# EAGLE board KCVGA (EAGLE 7.2.0)
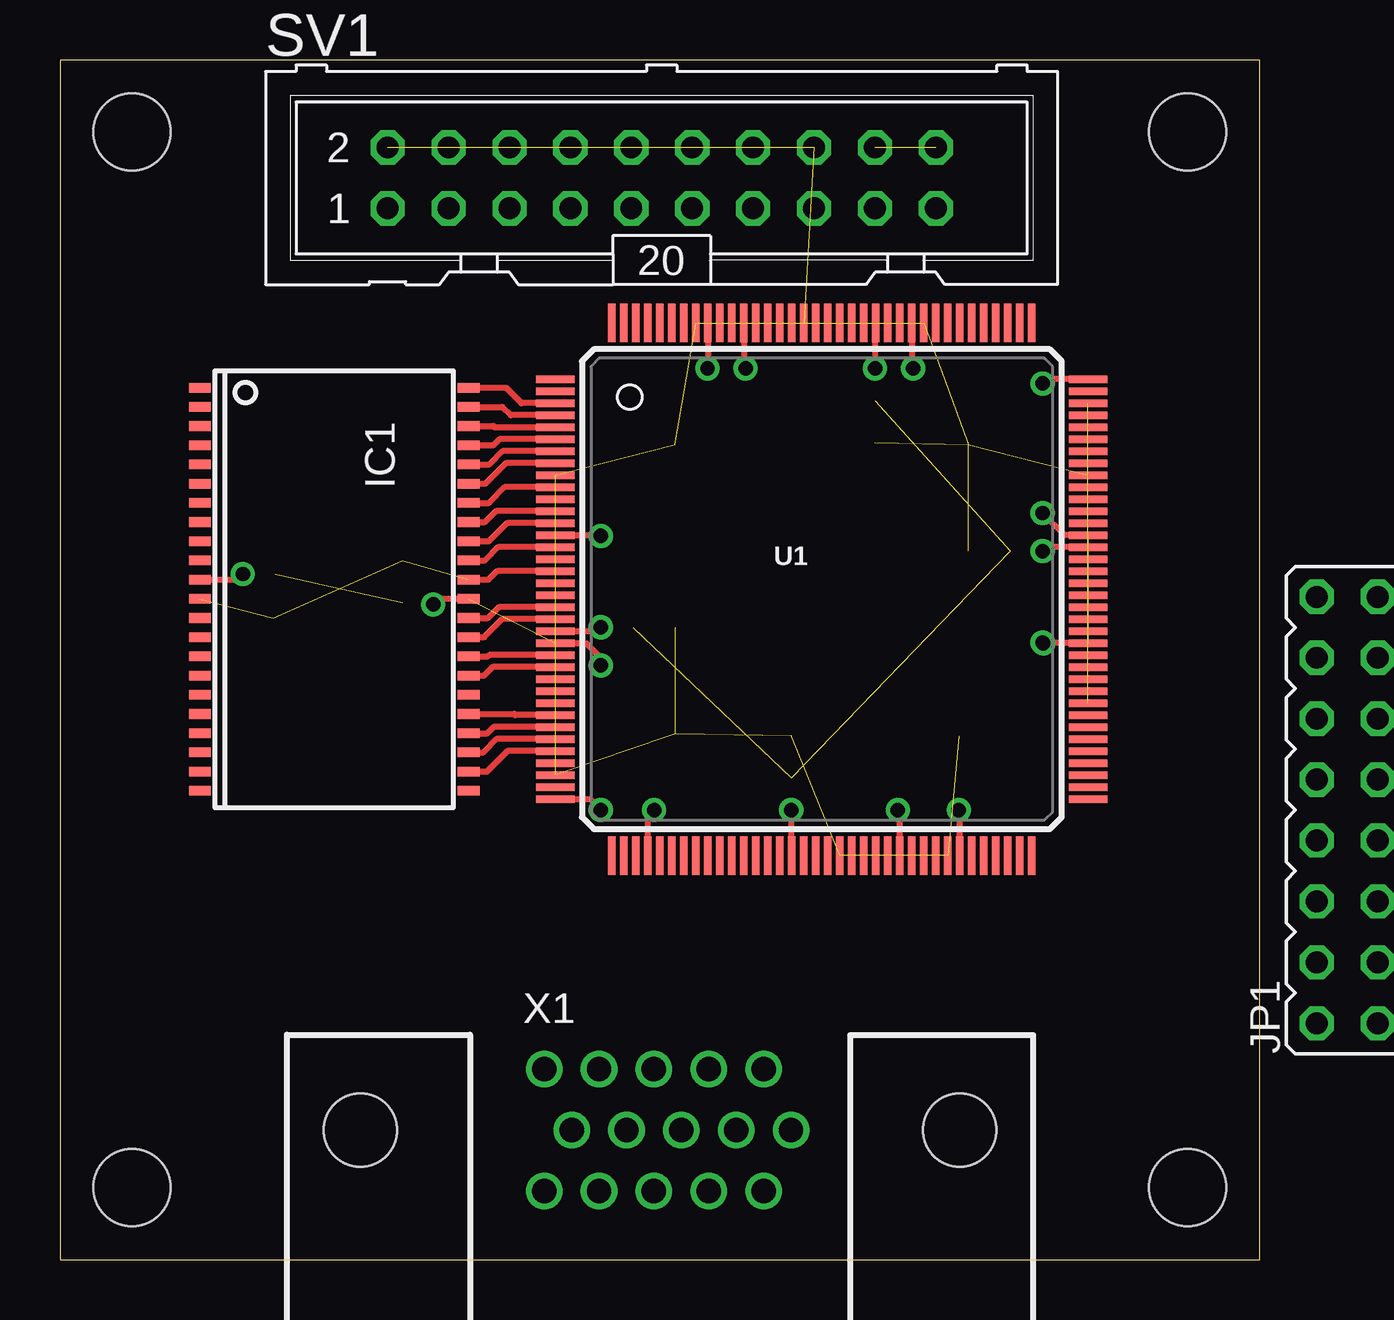
[diagram p0: board, top side]
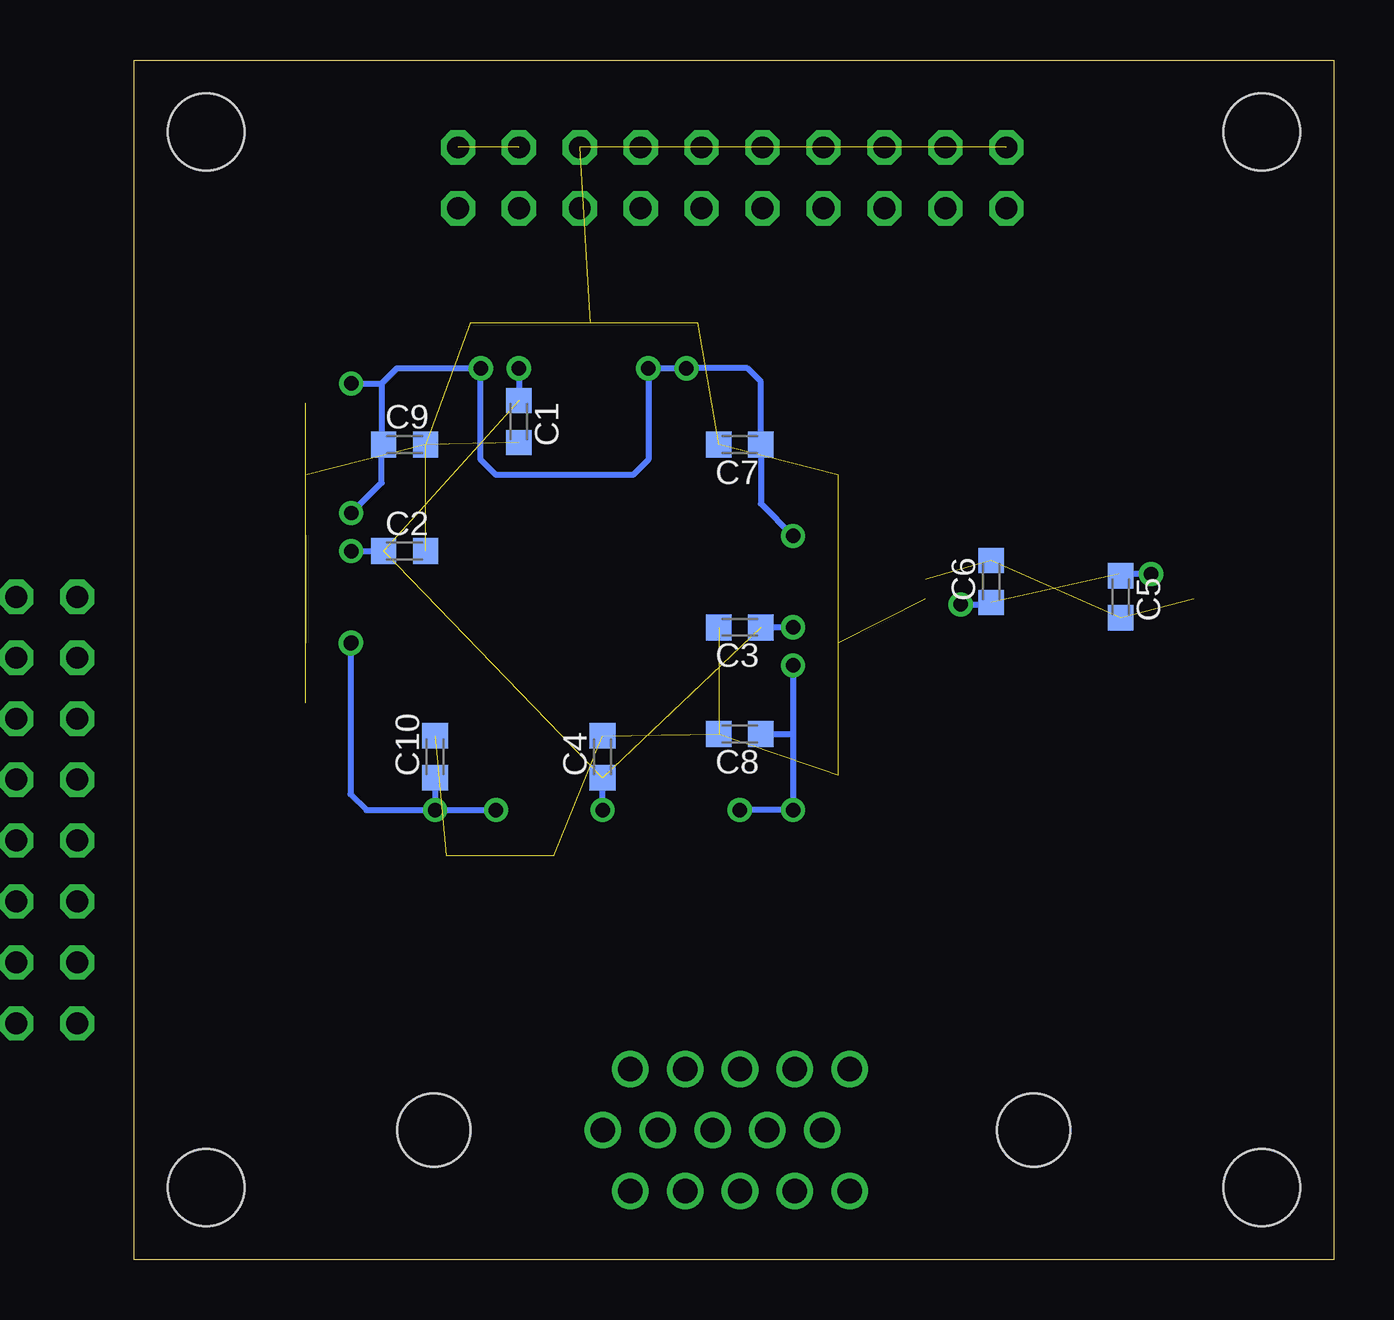
[diagram p1: board, bottom side, seen from below]

Size 50 x 50 mm. Coordinates in mm from the lower left corner, seen from the top.
Outline: 0,0 50,0 50,50 0,50 0,0
Copper layers (1*16): Top 0.035mm / dielectric 1.5mm / Bottom 0.035mm
Design rules "default": minimum track width 10mil, minimum drill 24mil, track to track 8mil, track to pad 8mil, pad to pad 8mil, via to via 8mil, smd to smd 8mil, copper to edge 40mil, drill to drill 8mil, minimum pad ring 10mil, minimum via ring 8mil, stop-mask expansion 4mil, vias tented up to drill 0mil, thermal gap 10mil
Holes 3.2 mm at 3,47 47,47 47,3 3,3

## Footprints (pad centres in the part's own frame; a part is rotated, then mirrored left to right if it is on the bottom)
C0603K = smd 1.05 x 1.08: 1 -0.875,0; 2 0.875,0
TSOP44-II = smd 0.4 x 0.9: 1 -8.4,-5.6; 2 -7.6,-5.6; 3 -6.8,-5.6; 4 -6,-5.6; 5 -5.2,-5.6; 6 -4.4,-5.6; 7 -3.6,-5.6; 8 -2.8,-5.6; 9 -2,-5.6; 10 -1.2,-5.6; 11 -0.4,-5.6; 12 0.4,-5.6; 13 1.2,-5.6; 14 2,-5.6; 15 2.8,-5.6; 16 3.6,-5.6; 17 4.4,-5.6; 18 5.2,-5.6; 19 6,-5.6; 20 6.8,-5.6; 21 7.6,-5.6; 22 8.4,-5.6; 23 8.4,5.6; 24 7.6,5.6; 25 6.8,5.6; 26 6,5.6; 27 5.2,5.6; 28 4.4,5.6; 29 3.6,5.6; 30 2.8,5.6; 31 2,5.6; 32 1.2,5.6; 33 0.4,5.6; 34 -0.4,5.6; 35 -1.2,5.6; 36 -2,5.6; 37 -2.8,5.6; 38 -3.6,5.6; 39 -4.4,5.6; 40 -5.2,5.6; 41 -6,5.6; 42 -6.8,5.6; 43 -7.6,5.6; 44 -8.4,5.6
JP8Q = drill 0.914 octagon: 1 -8.89,-1.27; 2 -8.89,1.27; 3 -6.35,-1.27; 4 -6.35,1.27; 5 -3.81,-1.27; 6 -3.81,1.27; 7 -1.27,-1.27; 8 -1.27,1.27; 9 1.27,-1.27; 10 1.27,1.27; 11 3.81,-1.27; 12 3.81,1.27; 13 6.35,-1.27; 14 6.35,1.27; 15 8.89,-1.27; 16 8.89,1.27
ML20 = drill 0.914 octagon: 1 -11.43,-1.27; 2 -11.43,1.27; 3 -8.89,-1.27; 4 -8.89,1.27; 5 -6.35,-1.27; 6 -6.35,1.27; 7 -3.81,-1.27; 8 -3.81,1.27; 9 -1.27,-1.27; 10 -1.27,1.27; 11 1.27,-1.27; 12 1.27,1.27; 13 3.81,-1.27; 14 3.81,1.27; 15 6.35,-1.27; 16 6.35,1.27; 17 8.89,-1.27; 18 8.89,1.27; 19 11.43,-1.27; 20 11.43,1.27
TQ144 = smd 1.6 x 0.3: P1 -11.1,8.75; P2 -11.1,8.25; P3 -11.1,7.75; P4 -11.1,7.25; P5 -11.1,6.75; P6 -11.1,6.25; P7 -11.1,5.75; P8 -11.1,5.25; P9 -11.1,4.75; P10 -11.1,4.25; P11 -11.1,3.75; P12 -11.1,3.25; P13 -11.1,2.75; P14 -11.1,2.25; P15 -11.1,1.75; P16 -11.1,1.25; P17 -11.1,0.75; P18 -11.1,0.25; P19 -11.1,-0.25; P20 -11.1,-0.75; P21 -11.1,-1.25; P22 -11.1,-1.75; P23 -11.1,-2.25; P24 -11.1,-2.75; P25 -11.1,-3.25; P26 -11.1,-3.75; P27 -11.1,-4.25; P28 -11.1,-4.75; P29 -11.1,-5.25; P30 -11.1,-5.75; P31 -11.1,-6.25; P32 -11.1,-6.75; P33 -11.1,-7.25; P34 -11.1,-7.75; P35 -11.1,-8.25; P36 -11.1,-8.75; P73 11.1,-8.75; P74 11.1,-8.25; P75 11.1,-7.75; P76 11.1,-7.25; P77 11.1,-6.75; P78 11.1,-6.25; P79 11.1,-5.75; P80 11.1,-5.25; P81 11.1,-4.75; P82 11.1,-4.25; P83 11.1,-3.75; P84 11.1,-3.25; P85 11.1,-2.75; P86 11.1,-2.25; P87 11.1,-1.75; P88 11.1,-1.25; P89 11.1,-0.75; P90 11.1,-0.25; P91 11.1,0.25; P92 11.1,0.75; P93 11.1,1.25; P94 11.1,1.75; P95 11.1,2.25; P96 11.1,2.75; P97 11.1,3.25; P98 11.1,3.75; P99 11.1,4.25; P100 11.1,4.75; P101 11.1,5.25; P102 11.1,5.75; P103 11.1,6.25; P104 11.1,6.75; P105 11.1,7.25; P106 11.1,7.75; P107 11.1,8.25; P108 11.1,8.75 | smd 0.3 x 1.6: P37 -8.75,-11.1; P38 -8.25,-11.1; P39 -7.75,-11.1; P40 -7.25,-11.1; P41 -6.75,-11.1; P42 -6.25,-11.1; P43 -5.75,-11.1; P44 -5.25,-11.1; P45 -4.75,-11.1; P46 -4.25,-11.1; P47 -3.75,-11.1; P48 -3.25,-11.1; P49 -2.75,-11.1; P50 -2.25,-11.1; P51 -1.75,-11.1; P52 -1.25,-11.1; P53 -0.75,-11.1; P54 -0.25,-11.1; P55 0.25,-11.1; P56 0.75,-11.1; P57 1.25,-11.1; P58 1.75,-11.1; P59 2.25,-11.1; P60 2.75,-11.1; P61 3.25,-11.1; P62 3.75,-11.1; P63 4.25,-11.1; P64 4.75,-11.1; P65 5.25,-11.1; P66 5.75,-11.1; P67 6.25,-11.1; P68 6.75,-11.1; P69 7.25,-11.1; P70 7.75,-11.1; P71 8.25,-11.1; P72 8.75,-11.1; P109 8.75,11.1; P110 8.25,11.1; P111 7.75,11.1; P112 7.25,11.1; P113 6.75,11.1; P114 6.25,11.1; P115 5.75,11.1; P116 5.25,11.1; P117 4.75,11.1; P118 4.25,11.1; P119 3.75,11.1; P120 3.25,11.1; P121 2.75,11.1; P122 2.25,11.1; P123 1.75,11.1; P124 1.25,11.1; P125 0.75,11.1; P126 0.25,11.1; P127 -0.25,11.1; P128 -0.75,11.1; P129 -1.25,11.1; P130 -1.75,11.1; P131 -2.25,11.1; P132 -2.75,11.1; P133 -3.25,11.1; P134 -3.75,11.1; P135 -4.25,11.1; P136 -4.75,11.1; P137 -5.25,11.1; P138 -5.75,11.1; P139 -6.25,11.1; P140 -6.75,11.1; P141 -7.25,11.1; P142 -7.75,11.1; P143 -8.25,11.1; P144 -8.75,11.1
HDR15RA = drill 1.016: 1 4.318,2.54; 2 2.032,2.54; 3 -0.254,2.54; 4 -2.54,2.54; 5 -4.826,2.54; 6 5.461,0; 7 3.175,0; 8 0.889,0; 9 -1.397,0; 10 -3.683,0; 11 4.318,-2.54; 12 2.032,-2.54; 13 -0.254,-2.54; 14 -2.54,-2.54; 15 -4.826,-2.54 | hole 3.048: -12.497,0; 12.497,0

## Placement (x,y rotation side)
C1  100n  [C0603K]  33.97,34.92 270 bottom
C2  100n  [C0603K]  38.73,29.53 0 bottom
C3  100n  [C0603K]  24.77,26.35 180 bottom
C4  100n  [C0603K]  30.48,20.95 90 bottom
C5  100n  [C0603K]  8.89,27.62 270 bottom
C6  100n  [C0603K]  14.29,28.26 90 bottom
C7  100n  [C0603K]  24.77,33.97 180 bottom
C8  100n  [C0603K]  24.77,21.91 180 bottom
C9  100n  [C0603K]  38.73,33.97 0 bottom
C10  100n  [C0603K]  37.47,20.95 90 bottom
IC1  M68AW128MND  [TSOP44-II]  11.43,27.94 270 top
JP1  [JP8Q]  53.66,18.73 90 top
SV1  [ML20]  25.08,45.09 0 top
U1  XC3S50ATQ144  [TQ144]  31.75,27.94 0 top
X1  D-SUB15-HDR15RA  [HDR15RA]  25.01,5.4 0 top

## Library data of the parts
C1-C10 = rcl
IC1 = st-microelectronics; OC_FARNELL: unknown; OC_NEWARK: unknown
JP1 = jumper
SV1 = con-ml; OC_FARNELL: unknown; OC_NEWARK: unknown
U1 = xilinx_devices_V6
X1 = con-thomas-betts; OC_FARNELL: unknown; OC_NEWARK: unknown

## Nets
3V3: C5.1 C6.1 C7.1 C8.1 C9.1 C10.1 IC1.11 IC1.33 U1.P14 U1.P23 U1.P36 U1.P40 U1.P61 U1.P66 U1.P86 U1.P95 U1.P108 U1.P119 U1.P133 U1.P136
+5V: SV1.18 SV1.20
A0: IC1.5
A1: IC1.4
A2: IC1.3
A3: IC1.2
A4: IC1.1
A5: IC1.44 U1.P3
A6: IC1.43 U1.P4
A7: IC1.42 U1.P5
A8: IC1.27 U1.P29
A9: IC1.26 U1.P30
A10: IC1.25 U1.P31
A11: IC1.24 U1.P32
A12: IC1.22
A13: IC1.21
A14: IC1.20
A15: IC1.19
A16: IC1.18
BHE: IC1.40 U1.P7
BLE: IC1.39 U1.P8
CE: IC1.6
D0: IC1.7
D1: IC1.8
D2: IC1.9
D3: IC1.10
D4: IC1.13
D5: IC1.14
D6: IC1.15
D7: IC1.16
D8: IC1.29 U1.P25
D9: IC1.30 U1.P24
D10: IC1.31 U1.P21
D11: IC1.32 U1.P20
D12: IC1.35 U1.P15
D13: IC1.36 U1.P13
D14: IC1.37 U1.P12
D15: IC1.38 U1.P10
GND: C1.2 C2.2 C3.2 C4.2 C5.2 C6.2 C7.2 C8.2 C9.2 C10.2 IC1.12 IC1.34 SV1.2 SV1.4 SV1.6 SV1.8 SV1.10 SV1.12 SV1.14 SV1.16 U1.P9 U1.P17 U1.P26 U1.P34 U1.P56 U1.P65 U1.P81 U1.P89 U1.P100 U1.P106 U1.P118 U1.P128 U1.P137
KC_B: SV1.11
KC_CLK: SV1.1
KC_EX: SV1.13
KC_EY: SV1.15
KC_EZ: SV1.17
KC_G: SV1.9
KC_HSYNC: SV1.3
KC_KBD: SV1.19
KC_R: SV1.7
KC_VSYNC: SV1.5
OE: IC1.41 U1.P6
VCCINT: C1.1 C2.1 C3.1 C4.1 U1.P22 U1.P52 U1.P94 U1.P122
WE: IC1.17

## Tracks (layer width: path | path; a pad name or v marks a point on that pad's centre or on a via)
3V3  (via drill 0.6)  (4 unrouted)
  Top 0.254: U1.P61 35,18.66 v34.92,18.73 | U1.P66 37.5,18.7 v37.47,18.73 | U1.P40 24.5,18.47 v24.77,18.73 | U1.P36 22.09,19.19 v22.54,18.73 | U1.P23 21.93,25.69 22.54,25.08 v22.54,24.77 | U1.P14 22.52,30.19 v22.54,30.16 | U1.P136 v27,37.16 v26.99,37.15 | U1.P133 28.5,37.22 v28.57,37.15 | U1.P119 35.5,37.21 v35.56,37.15 | U1.P108 41.13,36.69 v40.96,36.51 | U1.P95 41.88,30.19 v40.96,31.11 | U1.P86 v40.98,25.69 v40.96,25.72 | IC1.11 7.38,28.34 v7.62,28.57 | IC1.33 15.79,27.54 v15.56,27.3
  Bottom 0.254: v7.62,28.57 8.97,28.57 C5.1 | v15.56,27.3 14.53,27.3 C6.1 | v22.54,30.16 23.89,31.51 C7.1 23.89,36.59 24.45,37.15 v26.99,37.15 v28.57,37.15 28.57,33.34 29.21,32.7 34.92,32.7 35.56,33.34 v35.56,37.15 39.05,37.15 39.69,36.51 | v40.96,31.11 39.69,32.38 39.69,33.9 C9.1 39.69,34.05 39.69,36.51 | v40.96,36.51 39.69,36.51 | C10.1 v37.47,18.73 | v37.47,18.73 v34.92,18.73 | v40.98,25.69 40.98,19.39 40.32,18.73 v37.47,18.73 | v22.54,24.77 22.54,21.91 | 22.54,21.91 v22.54,18.73 v24.77,18.73 | C8.1 22.54,21.91
+5V  (1 unrouted)
A5
  Top 0.254: U1.P3 19.24,35.69 18.59,36.34 IC1.44
A6
  Top 0.254: U1.P4 18.79,35.19 18.43,35.54 IC1.43
A7
  Top 0.254: IC1.42 18.06,34.74 18.11,34.69 U1.P5
A8
  Top 0.254: IC1.27 18.93,22.74 18.98,22.69 U1.P29
A9
  Top 0.254: U1.P30 18.06,22.19 17.78,21.91 17.06,21.91 IC1.26
A10
  Top 0.254: U1.P31 18.2,21.69 17.65,21.14 IC1.25
A11
  Top 0.254: U1.P32 18.65,21.19 17.8,20.34 IC1.24
BHE
  Top 0.254: U1.P7 18.45,33.69 17.9,33.14 IC1.40
BLE
  Top 0.254: U1.P8 18.59,33.19 17.73,32.34 IC1.39
D8
  Top 0.254: U1.P25 18.02,24.69 17.67,24.34 IC1.29
D9
  Top 0.254: IC1.30 17.84,25.14 17.89,25.19 U1.P24
D10
  Top 0.254: U1.P21 18.43,26.69 17.68,25.94 IC1.31
D11
  Top 0.254: U1.P20 18.3,27.19 17.85,26.74 IC1.32
D12
  Top 0.254: U1.P15 18.26,29.69 17.71,29.14 IC1.35
D13
  Top 0.254: U1.P13 18.62,30.69 17.88,29.94 IC1.36
D14
  Top 0.254: U1.P12 18.17,31.19 17.72,30.74 IC1.37
D15
  Top 0.254: U1.P10 18.54,32.19 17.89,31.54 IC1.38
GND  (31 unrouted)
  Top 0.254: U1.P17 18.21,28.69 17.86,28.34 IC1.34
OE
  Top 0.254: U1.P6 18.32,34.19 18.07,33.94 IC1.41
VCCINT  (via drill 0.6)  (3 unrouted)
  Top 0.254: U1.P22 22.54,26.19 v22.54,26.35 | U1.P52 30.48,16.84 v30.48,18.73 | U1.P94 40.96,29.69 v40.96,29.53 | U1.P122 33.97,39.04 v33.97,37.15
  Bottom 0.254: v22.54,26.35 C3.1 | v30.48,18.73 C4.1 | v40.96,29.53 C2.1 | v33.97,37.15 C1.1